# Altium PCB TPS62441RQRR.pcbdoc
Units mil, origin at the board's own origin, x right, y up, seen from the top; angles counter-clockwise.
Board outline 627.1 x 622.1 mil, 2 copper layers (Top Layer, Bottom Layer), stack 0 mil thick; 1 components, 0 nets, 14 pads, 0 vias.
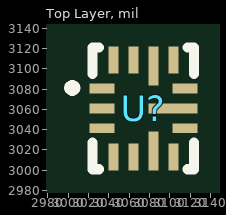
[diagram p0: Top Layer view]
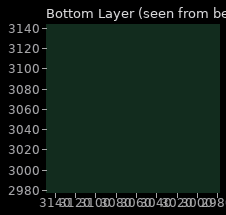
[diagram p1: Bottom Layer view, seen from below]

## Layer stack, top to bottom
Top Layer: signal copper (thickness not stored)
Bottom Layer: signal copper (thickness not stored)

## Board outline
3377.1,2750 2750,2750 2750,3372.1 3377.1,3372.1

## Components (designator, comment, footprint, x,y, rotation, side; value= is the part's Value field where it differs from the comment)
U? "TPS62441RQRR" VQFN-HR-14_L2.7-W2.3-P0.50-TL_TI_RQR0014A 3073.9,3061 r0 top

## Footprints (in the part's own frame and the unit in brackets; to place one, negate y for a bottom-side part, rotate by r counter-clockwise, add the part's x,y. Pads: shape width x height; smd on the part's side, far side on the other; paste and mask are expansions set on the pad)
VQFN-HR-14_L2.7-W2.3-P0.50-TL_TI_RQR0014A [mil]
  rect 24.6x9.8 smd: 1(-40.8,19.7) 2(-40.8,0) 3(-40.8,-19.6) 8(40.9,-19.6) 10(40.9,19.7)
  rect 9.8x26.6 smd: 4(-29.5,-47.7) 5(-9.8,-47.7) 7(29.6,-47.7) 11(29.6,47.8) 13(-9.8,47.8) 14(-29.5,47.8)
  rect 9.8x38.4 smd: 6(9.9,-41.8) 12(9.9,41.9)
  rect 48.2x9.8 smd: 9(29.1,0)
  silkscreen extent -74,-60 50,60

## Nets (pads, with @x,y where several pads share a name; then routed paths per layer and width w, separated by ;. In a path a pad name is that pad's centre, name@x,y a point inside that pad or via, vN(x,y) a via of type N, cw(c..) or ccw(c..) an arc to the next point about the centre after c; other vN are vias at no path point)
pads on no net: U?.1 U?.2 U?.3 U?.4 U?.5 U?.6 U?.7 U?.8 U?.9 U?.10 U?.11 U?.12 U?.13 U?.14